# Altium PCB sawtooth,tri.PcbDoc
Units mm, origin at the board's own origin, x right, y up, seen from the top; angles counter-clockwise.
Board outline 55.5 x 78.5 mm, 2 copper layers (Top Layer, Bottom Layer), stack 1.671 mm thick; 16 components, 16 nets, 57 pads, 0 vias.
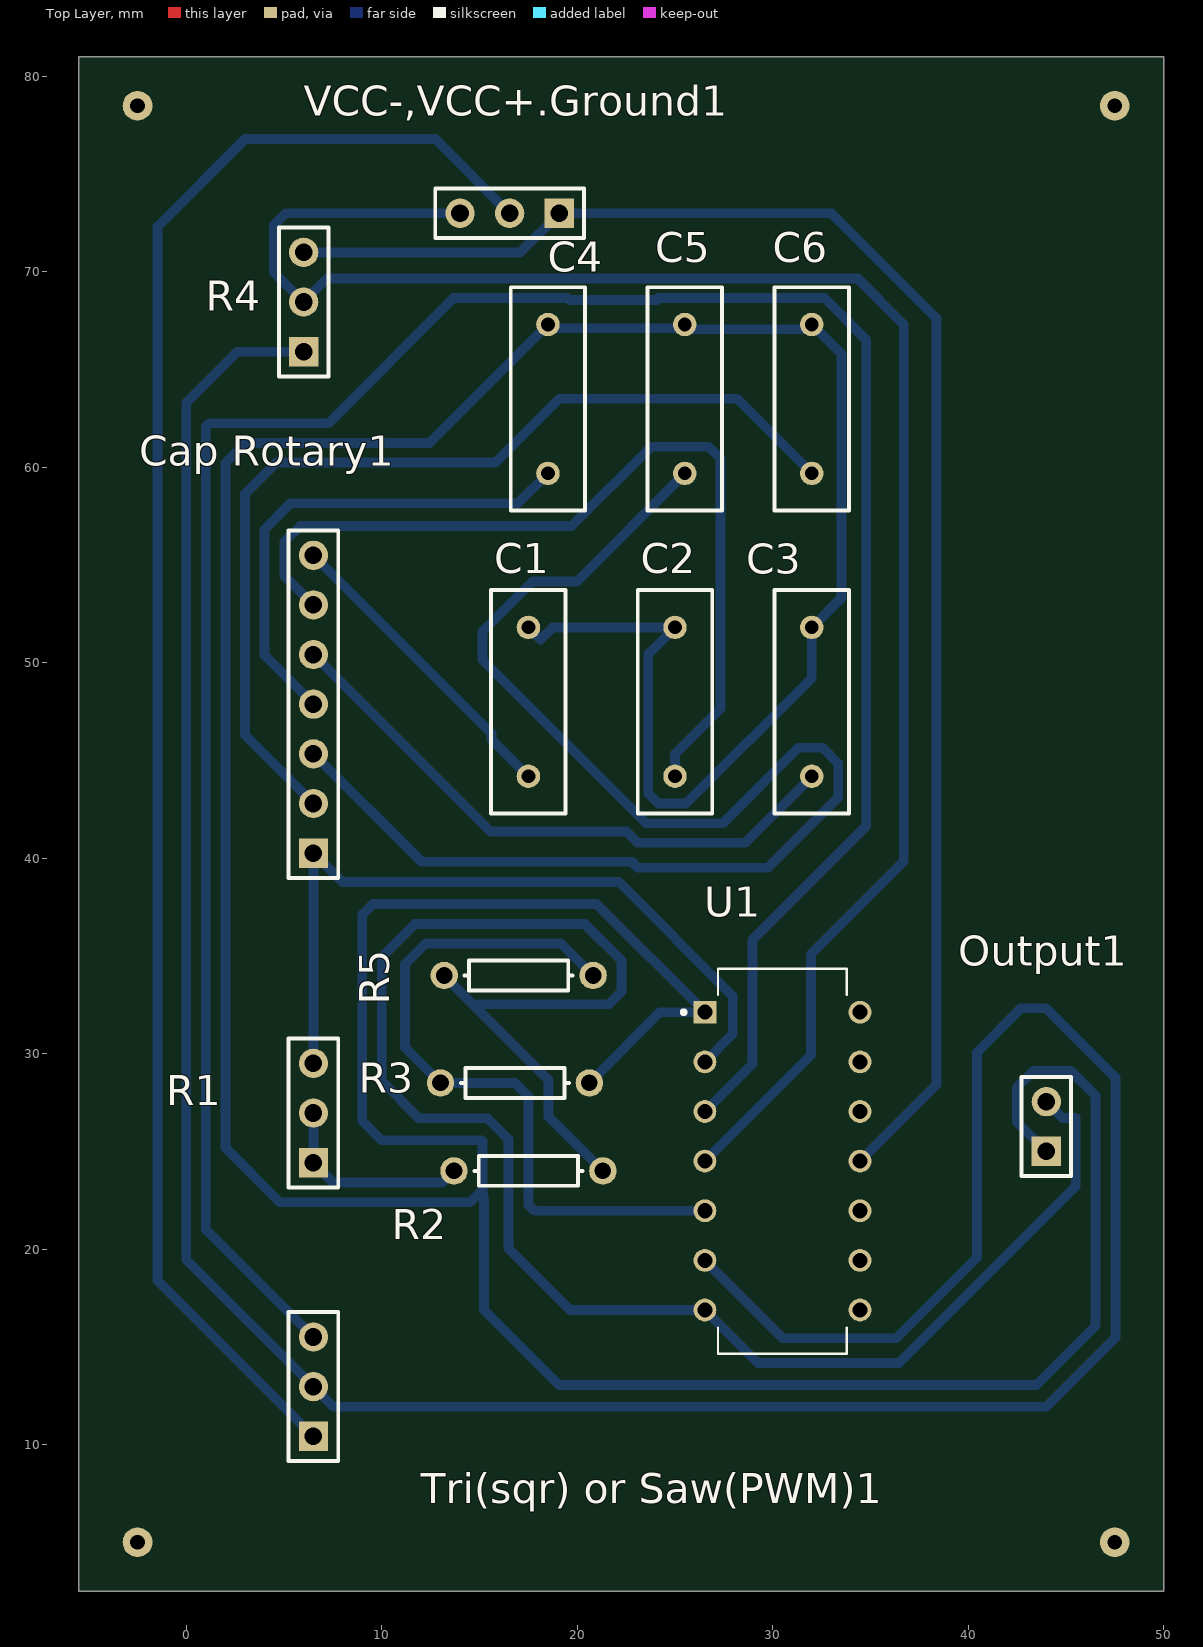
[diagram p0: Top Layer view]
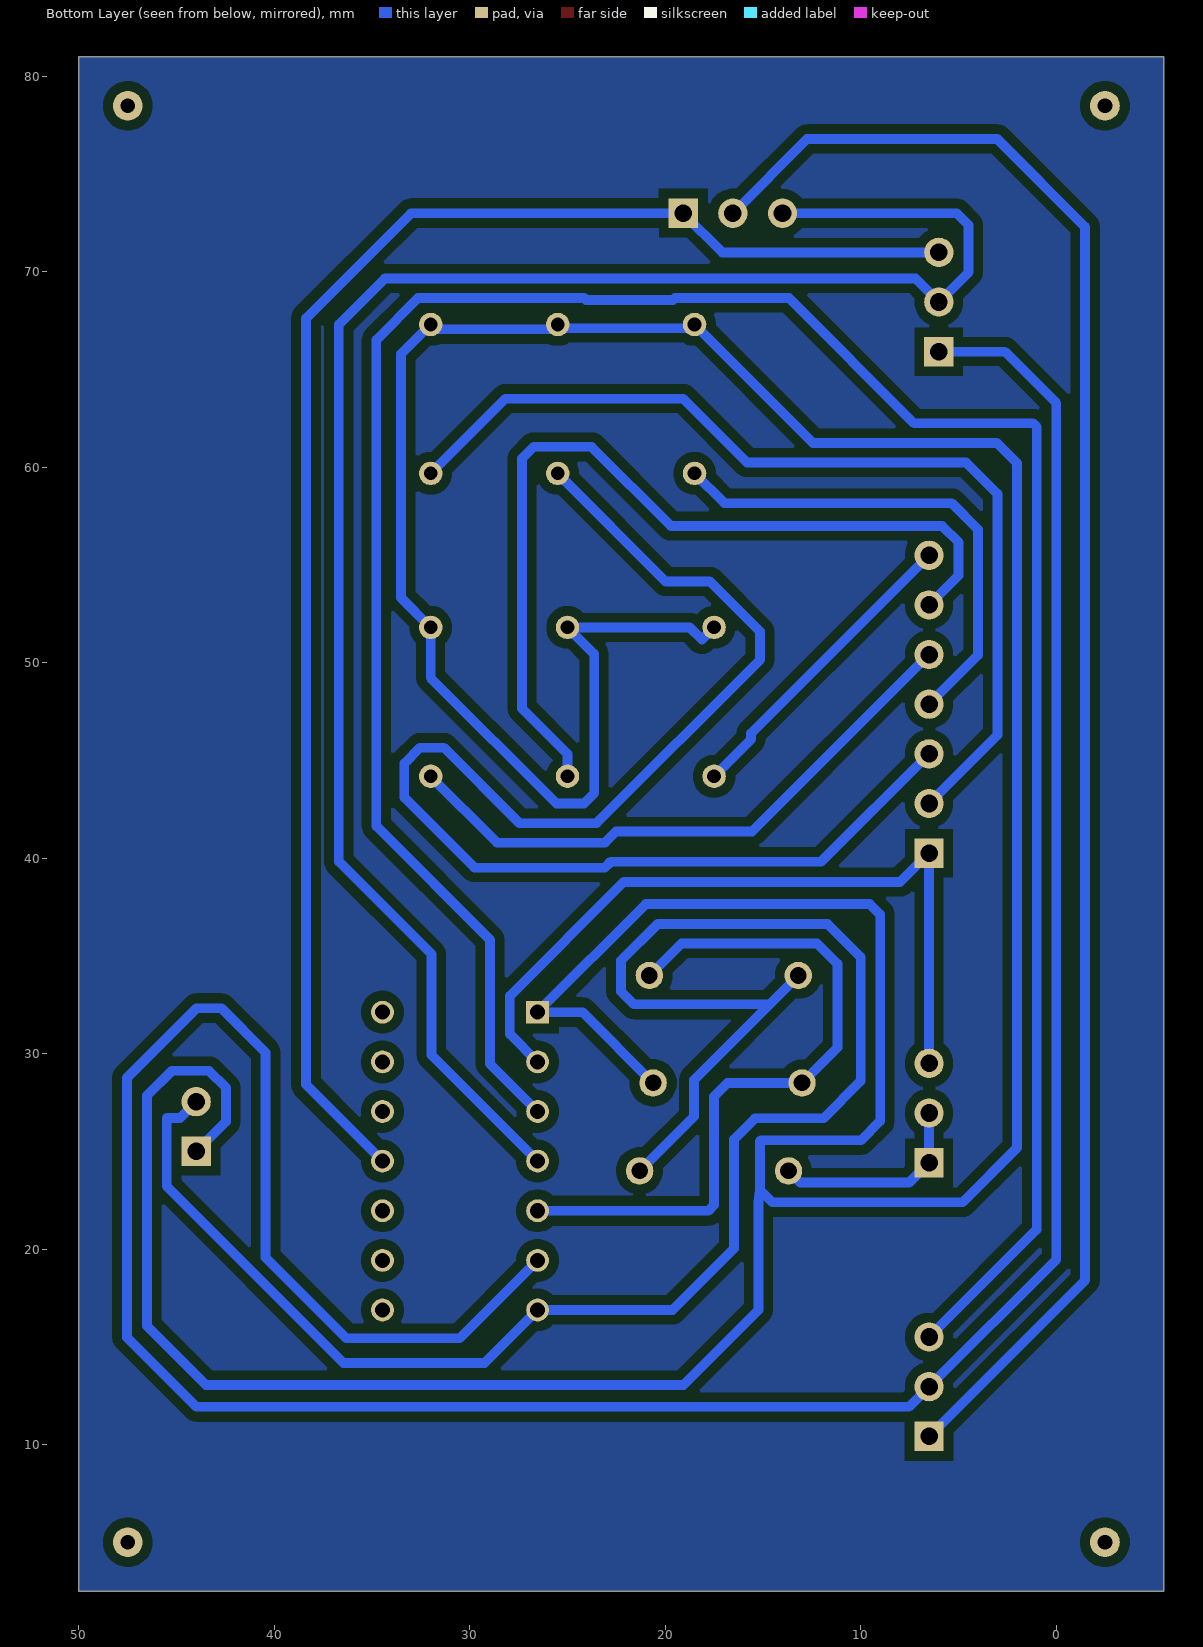
[diagram p1: Bottom Layer view, seen from below]

## Layer stack, top to bottom
Top Solder: solder mask 0.0102, Solder Resist, Dk 3.5
Top Layer: signal copper 0.0356
Dielectric 1: dielectric 1.6, FR-4, Dk 4.8
Bottom Layer: signal copper 0.0356
Bottom Solder: solder mask 0.0102, Solder Resist, Dk 3.5

## Board outline
50,81 50,2.5 -5.5,2.5 -5.5,81 -4.5,81

## Design rules (kind name [scope] priority, off if disabled: settings)
Clearance [All] p1: gap=0.5 ignorepadtopadclearanceinfootprint=FALSE
PolygonConnect [All] p1: connectstyle=Relief reliefconductorwidth=0.254 reliefentries=4 polygonreliefangle="90 Angle" airgapwidth=0.254
RoutingLayers [All] p1: top layer_v5=FALSE bottom layer_v5=TRUE
RoutingVias [All] p1: holewidth=0.3 width=0.6 viastyle="Through Hole" minholewidth=0.3 minwidth=0.6 maxholewidth=0.3 maxwidth=0.6
SolderMaskExpansion [All] p1: expansion=0.102 istentingtop=FALSE
Width [All] p1: maxlimit=1 minlimit=0.3 preferedwidth=0.5
29 further rules are at their usual default settings.

## Components (designator, comment, footprint, x,y, rotation, side; value= is the part's Value field where it differs from the comment)
C1 "Cap" RAD-0.3 17.5,48 r90 top value=20nF
C2 "Cap" RAD-0.3 25,48 r90 top value=0.068uF
C3 "Cap" RAD-0.3 32,48 r90 top value=0.22uF
C4 "Cap" RAD-0.3 18.5,63.5 r90 top value=0.68uF
C5 "Cap" RAD-0.3 25.5,63.5 r90 top value=2.2uF
C6 "Cap" RAD-0.3 32,63.5 r90 top value=10uF
"Cap Rotary1" "Header 7" HDR1X7 6.5,40.26 r90 top
Output1 "Header 2" HDR1X2 44,25 r90 top
R1 "Header 3" HDR1X3 6.5,24.42 r90 top
R2 "Res1" AXIAL-0.3 17.5,24 r180 top value=2.4K
R3 "Res1" AXIAL-0.3 16.81,28.5 r180 top value=1K
R4 "Header 3" HDR1X3 19.08,73 r180 top
R5 "Res1" AXIAL-0.3 17,34 r180 top value=12K
"Tri(sqr) or Saw(PWM)1" "Header 3" HDR1X3 6.5,10.42 r90 top
U1 "TL074CN" DIP794W45P254L1969H508Q14 30.5,24.5 r0 top
VCC-,VCC+.Ground1 "Header 3" HDR1X3 6,65.92 r90 top

## Footprints (in the part's own frame and the unit in brackets; to place one, negate y for a bottom-side part, rotate by r counter-clockwise, add the part's x,y. Pads: shape width x height; smd on the part's side, far side on the other; paste and mask are expansions set on the pad)
AXIAL-0.3 [mm] "Axial Device, Thru-Hole; 2 Leads; 0.3 in Pin Spacing"
  round 1.4 hole 0.85: 1(-3.81,0) 2(3.81,0)
  silkscreen extent -2.77,-0.76 2.77,0.76
DIP794W45P254L1969H508Q14 [mm]
  rect 1.17x1.17 hole 0.77: 1(-3.97,7.62)
  round 1.17 hole 0.77: 2(-3.97,5.08) 3(-3.97,2.54) 4(-3.97,0) 5(-3.97,-2.54) 6(-3.97,-5.08) 7(-3.97,-7.62) 8(3.97,-7.62) 9(3.97,-5.08) 10(3.97,-2.54) 11(3.97,0) 12(3.97,2.54) 13(3.97,5.08) 14(3.97,7.62)
  silkscreen extent -5.15,-9.85 3.3,9.84
HDR1X2 [mm] "Connector; Header; 2 Position"
  rect 1.5x1.5 hole 0.9: 1(0,0)
  round 1.5 hole 0.9: 2(2.54,0)
  silkscreen extent -1.27,-1.27 3.81,1.27
HDR1X3 [mm] "Connector; Header; 3 Position"
  rect 1.5x1.5 hole 0.9: 1(0,0)
  round 1.5 hole 0.9: 2(2.54,0) 3(5.08,0)
  silkscreen extent -1.27,-1.27 6.35,1.27
HDR1X7 [mm] "Connector; Header; 7 Position"
  rect 1.5x1.5 hole 0.9: 1(0,0)
  round 1.5 hole 0.9: 2(2.54,0) 3(5.08,0) 4(7.62,0) 5(10.16,0) 6(12.7,0) 7(15.24,0)
  silkscreen extent -1.27,-1.27 16.51,1.27
RAD-0.3 [mm] "Radial Cap, Thru-Hole; 2 Leads; 0.3 in Pin Spacing"
  round 1.2 hole 0.7: 1(-3.81,0) 2(3.81,0)
  silkscreen extent -5.71,-1.9 5.72,1.91

## Part data
C1 C2 C3 C4 C5 C6: "Capacitor", LatestRevisionDate=17-Jul-2002, LatestRevisionNote="Re-released for DXP Platform.", PackageDescription="Radial Cap, Thru-Hole; 2 Leads; 0.3 in Pin Spacing", PackageReference=RAD-0.3, Published=8-Jun-2000, Publisher="Altium Limited"
"Cap Rotary1": "Header, 7-Pin", LatestRevisionDate=17-Jul-2002, LatestRevisionNote="Re-released for DXP Platform.", Publisher="Altium Limited"
Output1: "Header, 2-Pin", LatestRevisionDate=17-Jul-2002, LatestRevisionNote="Re-released for DXP Platform.", Publisher="Altium Limited"
R1 R4 "Tri(sqr) or Saw(PWM)1" VCC-,VCC+.Ground1: "Header, 3-Pin", LatestRevisionDate=17-Jul-2002, LatestRevisionNote="Re-released for DXP Platform.", Publisher="Altium Limited"
R2 R3 R5: "Resistor", LatestRevisionDate=17-Jul-2002, LatestRevisionNote="Re-released for DXP Platform.", PackageDescription="Axial Device, Thru-Hole; 2 Leads; 0.3 in Pin Spacing", PackageReference=AXIAL-0.3, Published=8-Jun-2000, Publisher="Altium Limited"
U1: "Quad Low-Noise JFET-Input General-Purpose Operational Amplifier 14-PDIP 0 to 70", Package="PDIP-14 Texas Instruments", Availability=Good, DigiKey-Purchase-URL=https://snapeda.com/shop?store=DigiKey&id=4796371, MF="Texas Instruments", Mouser-Purchase-URL=https://snapeda.com/shop?store=Mouser&id=4796371, MP=TL074CN, Price=None, SnapEDA_Link=https://www.snapeda.com/parts/TL074CN/Texas%20Instruments/view-part/4796371/?ref=snap, Texas_Instruments-Purchase-URL=https://snapeda.com/shop?store=Texas+Instruments&id=4796371

## Free pads (board coordinates)
  round 1.524 hole 0.762: 1(-2.5,78.5) 2(47.5,78.5) 4(-2.5,5) 5(47.5,5)

## Nets (pads, with @x,y where several pads share a name; then routed paths per layer and width w, separated by ;. In a path a pad name is that pad's centre, name@x,y a point inside that pad or via, vN(x,y) a via of type N, cw(c..) or ccw(c..) an arc to the next point about the centre after c; other vN are vias at no path point)
NetC1_1: "Cap Rotary1.7" C1.1 | length 15.9
  Bottom Layer w0.5: 6.5,55.5 15.608,46.392 15.608,46.082 C1.1
NetC1_2: C1.2 C2.2 C3.2 C4.2 C5.2 C6.2 Output1.1 R3.1 U1.1 | length 238.7
  Bottom Layer w0.5: C1.2 18.123,51.187 18.746,51.81 C2.2 23.635,50.445 23.635,43.32 24.16,42.794 25.565,42.794 32,49.229 C3.2 33.517,53.327 33.517,65.793 C6.2 32,67.066 25.744,67.066 C5.2 25.31,67.12 18.69,67.12 C4.2 12.442,61.252 3.031,61.252 1.994,60.214 1.994,25.184 4.788,22.39 14.516,22.39 15.151,23.025 ; R3.1 24.24,32.12 U1.1 20.995,37.655 9.538,37.655 9,37.118 9,26.547 9.982,25.565 15.1,25.565 15.151,25.514 15.151,23.025 ; Output1.1 42.481,26.519 42.481,28.257 43.345,29.121 45.25,29.121 46.52,27.851 46.52,16.065 43.5,13.045 19.06,13.045 15.227,16.878 15.227,22.39 15.151,23.025
NetC2_1: "Cap Rotary1.6" C2.1 | length 45.7
  Bottom Layer w0.5: 6.5,52.96 5,54.46 5,56.172 5.828,57 19.713,57 23.762,61.049 26.731,61.049 27.33,60.45 27.33,47.656 25,45.326 C2.1
NetC3_1: "Cap Rotary1.5" C3.1 | length 30.9
  Bottom Layer w0.5: 6.5,50.42 15.556,41.364 22.513,41.364 23.083,40.794 28.604,40.794 C3.1
NetC4_1: "Cap Rotary1.4" C4.1 | length 25.7
  Bottom Layer w0.5: 6.5,47.88 3.994,50.386 3.994,56.821 5.339,58.166 16.976,58.166 C4.1
NetC5_1: "Cap Rotary1.3" C5.1 | length 71.2
  Bottom Layer w0.5: 6.5,45.34 12.023,39.817 22.787,39.817 23.089,39.515 29.76,39.515 33.35,43.105 33.35,44.856 32.55,45.656 31.331,45.656 27.468,41.794 23.509,41.794 15.151,50.152 15.151,51.6 17.716,54.165 19.975,54.165 C5.1
NetC6_1: "Cap Rotary1.2" C6.1 | length 49.9
  Bottom Layer w0.5: 6.5,42.8 2.994,46.306 2.994,58.644 4.602,60.252 15.82,60.252 19.081,63.513 28.177,63.513 C6.1
"NetCap Rotary1_1": "Cap Rotary1.1" R1.3 U1.2 | length 39.2
  Bottom Layer w0.5: R1.3 6.5,40.26 7.984,38.776 22.125,38.776 27.953,32.948 27.953,31.003 U1.2
NetOutput1_2: Output1.2 R2.1 R5.2 U1.7 | length 96.7
  Bottom Layer w0.5: R5.2 14.665,32.525 ; R2.1 18.534,26.776 18.534,28.656 14.665,32.525 ; Output1.2 44.832,26.708 45.504,26.708 45.504,23.208 36.462,14.166 29.243,14.166 U1.7 19.632,16.88 16.479,20.033 16.479,25.614 15.405,26.688 11.901,26.688 10,28.588 10,34.939 11.701,36.639 20.383,36.639 22.26,34.763 22.26,33.185 21.6,32.525 14.665,32.525
NetR1_1: R1.1 R1.2 R2.2 | length 10.4
  Bottom Layer w0.5: R1.2 R1.1 7.514,23.406 13.096,23.406 R2.2
NetR3_2: R3.2 R5.1 U1.5 | length 37.1
  Bottom Layer w0.5: R5.1 19.171,35.639 12.23,35.639 11.184,34.594 11.184,30.316 R3.2 16.812,28.5 17.507,27.805 17.507,22.25 17.797,21.96 U1.5
NetR4_1: R4.1 U1.11 VCC-,VCC+.Ground1.3 | length 80.2
  Bottom Layer w0.5: 6,71 17.08,71 R4.1 33.01,73 38.385,67.625 38.385,28.415 U1.11
NetR4_2: "Tri(sqr) or Saw(PWM)1.1" R4.2 | length 86.6
  Bottom Layer w0.5: 6.5,10.42 -1.481,18.401 -1.481,72.306 3.01,76.797 12.743,76.797 R4.2
NetR4_3: R4.3 U1.4 VCC-,VCC+.Ground1.2 | length 93.5
  Bottom Layer w0.5: R4.3 5.08,73 4.483,72.403 4.483,69.977 6,68.46 7.2,69.66 34.35,69.66 36.703,67.307 36.703,39.824 31.966,35.087 31.966,29.936 U1.4
"NetTri(sqr) or Saw(PWM)1_2": "Tri(sqr) or Saw(PWM)1.2" U1.6 VCC-,VCC+.Ground1.1 | length 153.6
  Bottom Layer w0.5: 6,65.92 2.623,65.92 -0.013,63.285 -0.013,19.473 6.5,12.96 7.535,11.925 43.98,11.925 47.536,15.481 47.536,28.765 43.98,32.321 42.71,32.321 40.449,30.061 40.449,19.571 36.309,15.43 30.52,15.43 U1.6
"NetTri(sqr) or Saw(PWM)1_3": "Tri(sqr) or Saw(PWM)1.3" U1.3 | length 129.2
  Bottom Layer w0.5: 6.5,15.5 0.994,21.006 0.994,62.079 1.167,62.252 7.262,62.252 13.67,68.66 19.503,68.66 19.596,68.567 24.05,68.567 24.143,68.66 32.645,68.66 34.785,66.52 34.785,41.643 28.969,35.827 28.969,29.479 U1.3
pads on no net: U1.8 U1.9 U1.10 U1.12 U1.13 U1.14

## Polygon pours and split planes (outlines as drawn)
no net on Bottom Layer "NONET_L02_P000" (solid, pour order 0): -5.5,81 50,81 50,2.5 -5.5,2.5

## Silkscreen, mask and mechanical layers (free items; w line width, h text height)
Board outline:
  lines w0.75: -5.5,2.5 50,2.5 50,81 -5.5,81 -5.5,2.5